# Altium PCB VW.PcbDoc
Units mm, origin at the board's own origin, x right, y up, seen from the top; angles counter-clockwise.
Board outline 83 x 40.5 mm, 2 copper layers (Top Layer, Bottom Layer), stack 0.325 mm thick; 83 components, 67 nets, 368 pads, 30 vias.
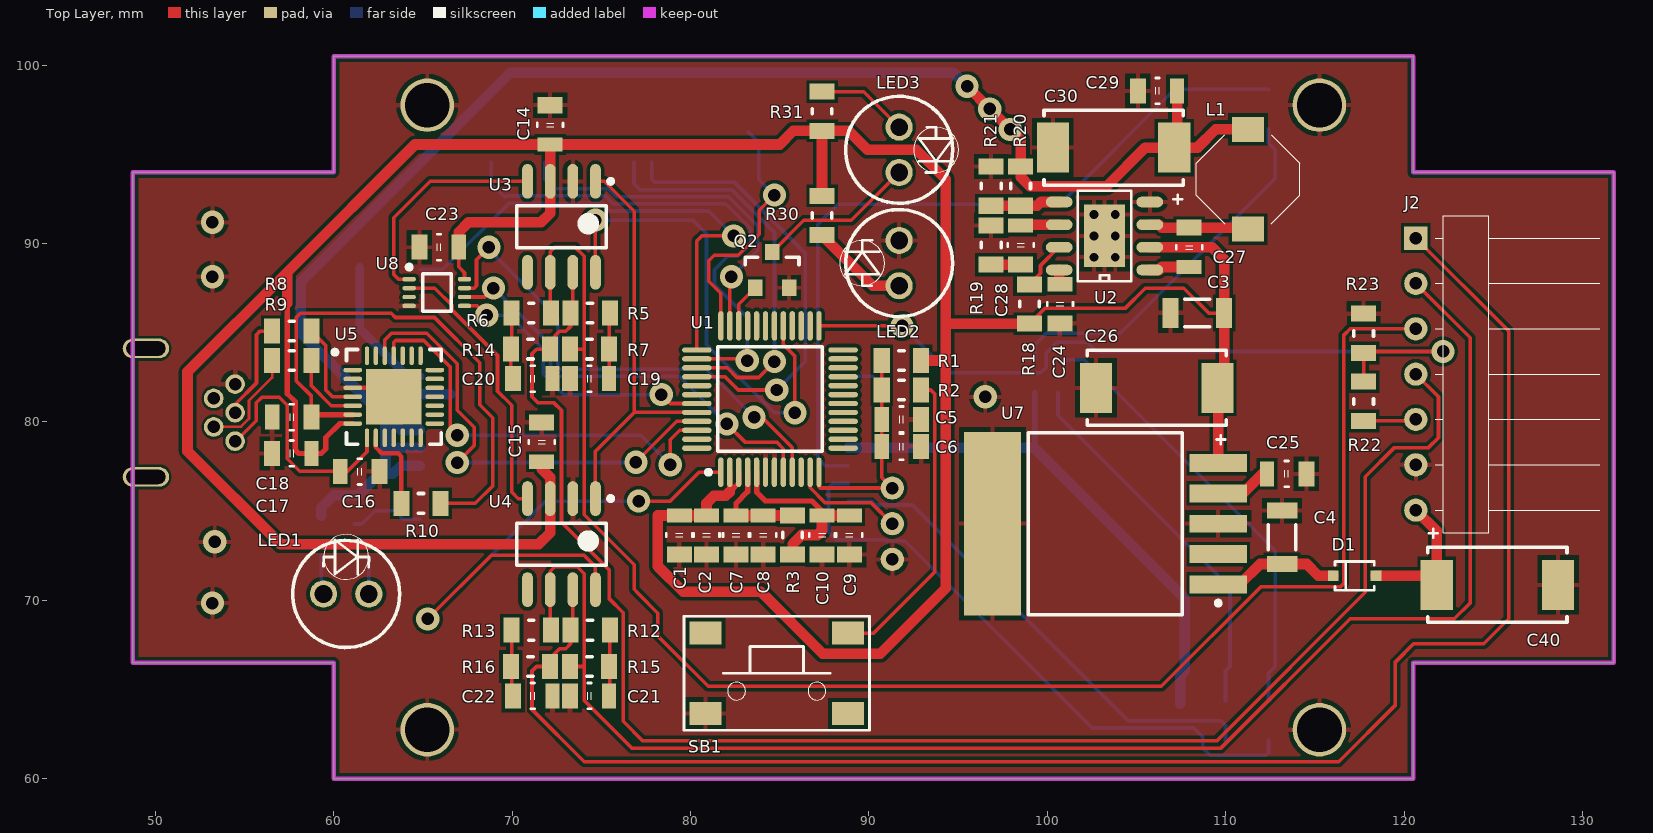
[diagram p0: Top Layer view]
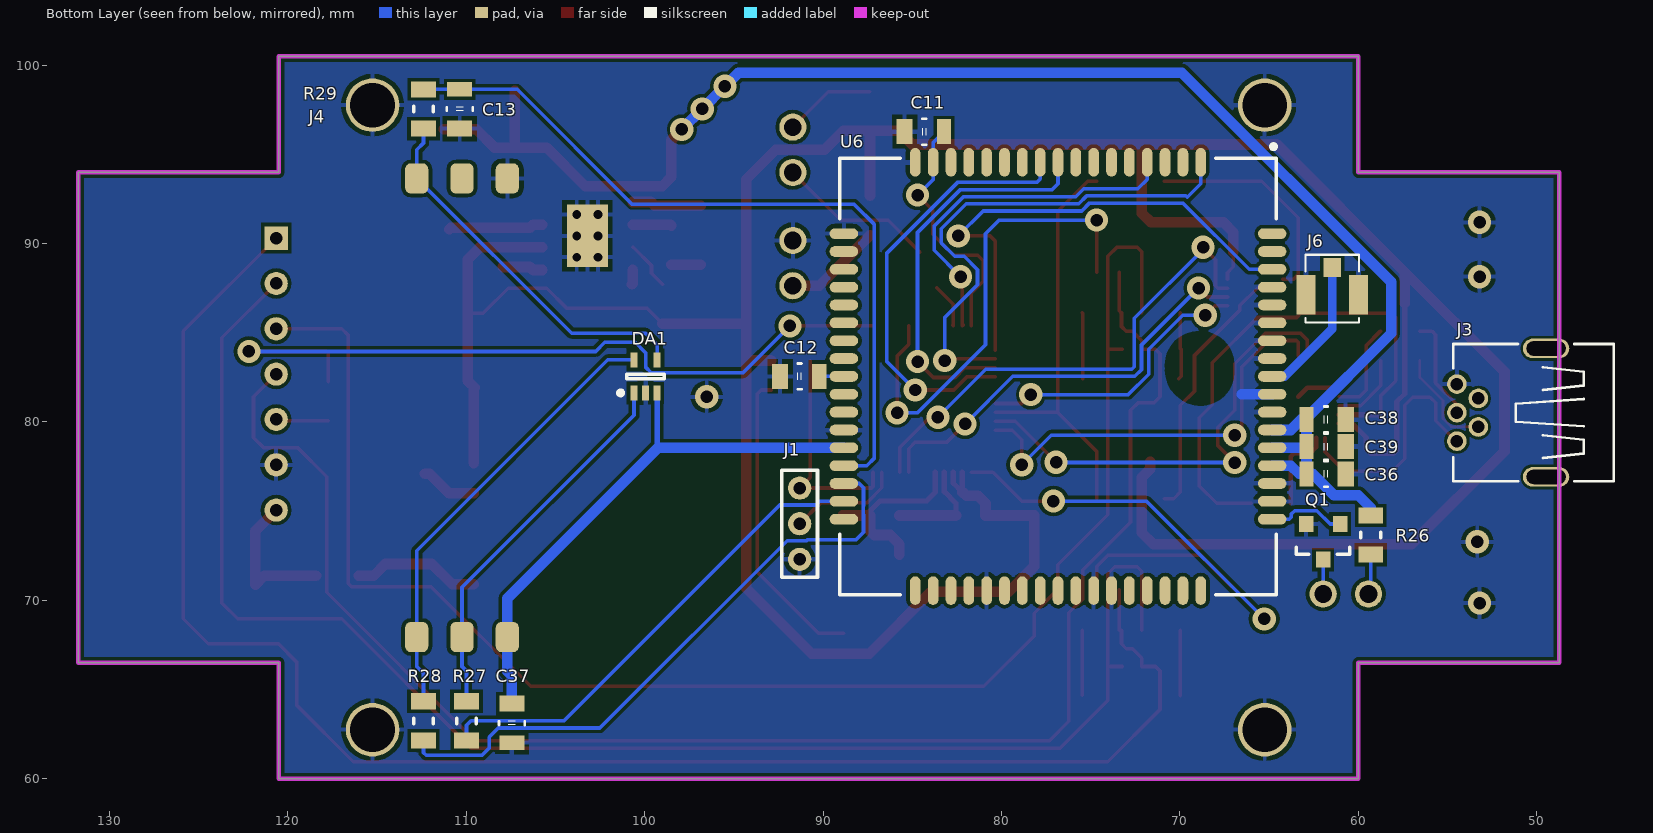
[diagram p1: Bottom Layer view, seen from below]
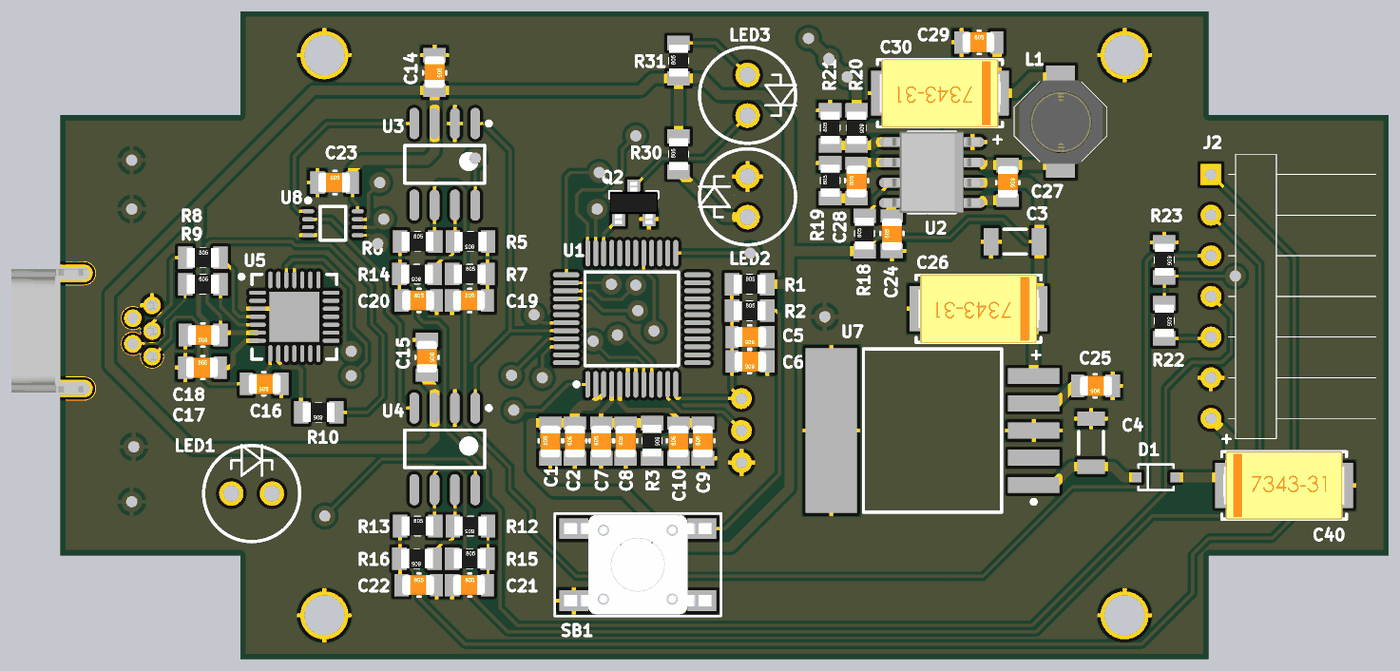
[diagram p2: 3D render of the assembled board from above, using the file's embedded part models]
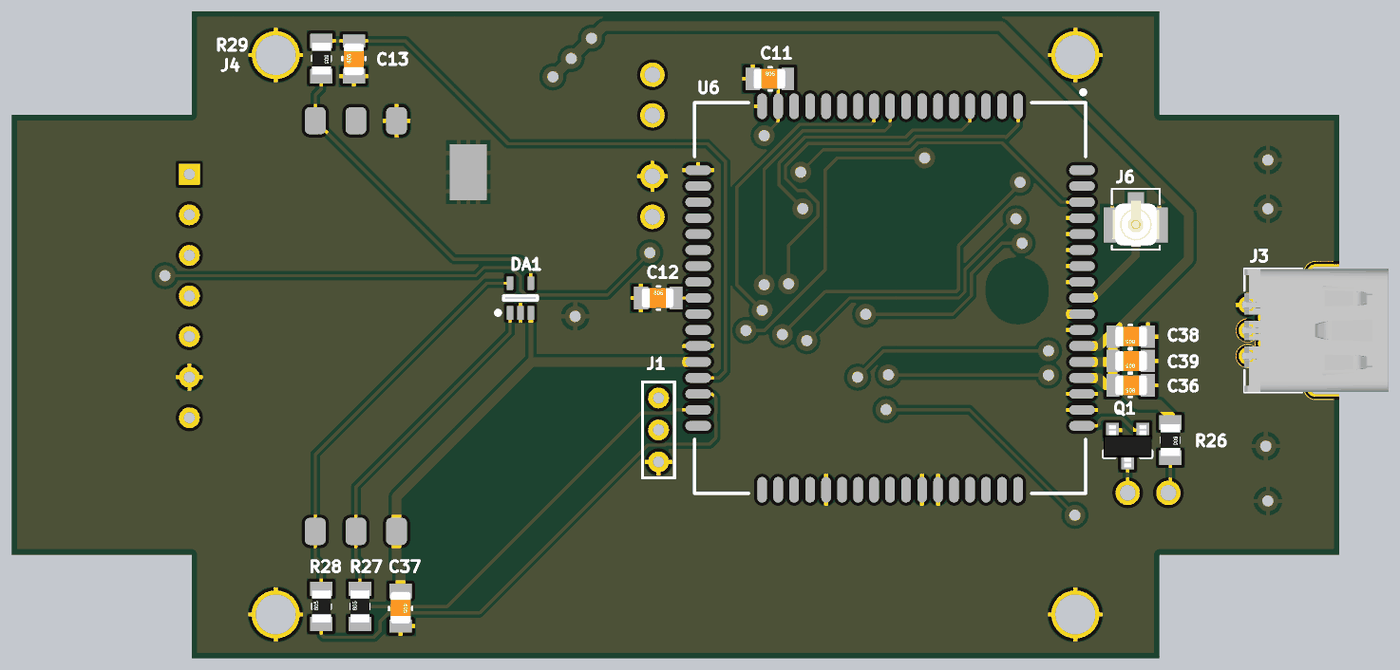
[diagram p3: 3D render of the assembled board from below, using the file's embedded part models]

## Layer stack, top to bottom
Dielectric 2: solder mask 0.0102, Solder Resist, Dk 3.5
Top Layer: signal copper 0.0356
Dielectric 1: core 0.254, FR-4, Dk 4.2
Bottom Layer: signal copper 0.0356
Dielectric 2 (Bottom Solder): solder mask 0.0102, Solder Resist, Dk 3.5

## Board outline
48.75,66.5 48.75,94 60,94 60,100.5 120.5,100.5 120.5,94 131.75,94 131.75,66.5 120.5,66.5 120.5,60 60,60 60,66.5

## Design rules (kind name [scope] priority, off if disabled: settings)
Clearance Clearance_USB [InComponent('J3')] p1: gap=0.15
Clearance [All] p2: gap=0.2
Height [All] p1: minheight=0 maxheight=8 prefheight=2
HoleSize [All] p1: absolutevalues=TRUE maxlimit=4 minlimit=0.5 maxpercent=80.000 minpercent=20.000
HoleToHoleClearance [All] p1: gap=0.2 allowstackedmicrovias=TRUE
MinimumSolderMaskSliver MinimumSolderMaskSliver_USB [InComponent('J3') vs InComponent('J3')] p1: minsoldermaskwidth=0
MinimumSolderMaskSliver [All] p2: minsoldermaskwidth=0.2
PlaneClearance [All] p1: clearance=0.5
PlaneConnect [All] p1: planeconnectstyle=Relief reliefexpansion=0.5 reliefentries=4 reliefconductorwidth=0.25 reliefairgap=0.25
PolygonConnect [All] p1: connectstyle=Relief reliefconductorwidth=0.25 reliefentries=4 polygonreliefangle="90 Angle" airgapwidth=0.25
RoutingCorners [All] p1: cornerstyle=45-Degree minsetback=1 maxsetback=1
RoutingVias [All] p1: holewidth=0.5 width=1 viastyle="Through Hole" minholewidth=0.5 minwidth=1 maxholewidth=1 maxwidth=2
SilkToBoardRegionClearance [NOT(InComponent('J3') OR InComponent('J5'))] p1:
SilkToSilkClearance [All] p1: silktosilkclearance=0.2
SilkToSolderMaskClearance SilkToSolderMaskClearance_RF [IsPad] p1: minsilkscreentomaskgap=0.1 clearancetoexposedcopper=TRUE
SilkToSolderMaskClearance [IsPad] p2: minsilkscreentomaskgap=0.2 clearancetoexposedcopper=TRUE
SolderMaskExpansion [All] p1: expansion=0.2
UnpouredPolygon [All] p1: allowunpoured=FALSE
Width [All] p1: maxlimit=1 minlimit=0.15 preferedwidth=0.2
19 further rules are at their usual default settings.

## Components (designator, comment, footprint, x,y, rotation, side; value= is the part's Value field where it differs from the comment)
C1 "100nF" CAPC0805X11N 79.375,73.66 r90 top
C2 "1uF" CAPC0805X11N 80.899,73.66 r90 top
C3 "10uF" CAPC1206X18N 108.412,86.101 r0 top
C4 "10uF" CAPC1206X18N 113.157,73.533 r270 top
C5 "100nF" CAPC0805X11N 91.821,80.137 r180 top
C6 "1uF" CAPC0805X11N 91.821,78.613 r180 top
C7 "100nF" CAPC0805X11N 82.55,73.66 r90 top
C8 "1uF" CAPC0805X11N 84.074,73.66 r90 top
C9 "100nF" CAPC0805X11N 88.9,73.66 r90 top
C10 "1uF" CAPC0805X11N 87.376,73.66 r90 top
C11 "100nF" CAPC0805X11N 84.328,96.266 r180 bottom
C12 "4.7uF" CAPC0805X11N 91.313,82.55 r180 bottom
C13 "22pF" CAPC0805X11N 110.363,97.536 r90 bottom
C14 "100nF" CAPC0805X11N 72.136,96.647 r270 top
C15 "100nF" CAPC0805X11N 71.662,78.867 r270 top
C16 "1uF" CAPC0805X11N 61.468,77.216 r180 top
C17 "1uF" CAPC0805X11N 57.658,78.232 r0 top
C18 "100nF" CAPC0805X11N 57.658,80.264 r180 top
C19 "47nF" CAPC0805X11N 74.338,82.423 r0 top
C20 "47nF" CAPC0805X11N 71.163,82.423 r0 top
C21 "47nF" CAPC0805X11N 74.338,64.643 r0 top
C22 "47nF" CAPC0805X11N 71.163,64.643 r0 top
C23 "100nF" CAPC0805X11N 65.913,89.789 r0 top
C24 "100nF" CAPC0805X11N 100.711,86.614 r90 top
C25 "100nF" CAPC0805X11N 113.411,77.089 r180 top
C26 "100uF" "CASE (D) TANT" 106.126,81.91 r0 top
C27 "10nF" CAPC0805X11N 107.95,89.784 r270 top
C28 "6.8nF" CAPC0805X11N 98.506,89.911 r90 top
C29 "2.2uF" CAPC0805X11N 106.172,98.552 r0 top
C30 "220uF" "CASE (D) TANT" 103.713,95.372 r0 top
C36 "100nF" CAPC0805X11N 61.811,77.087 r0 bottom
C37 "100nF" CAPC0805X11N 107.442,63.119 r270 bottom
C38 "100nF" CAPC0805X11N 61.811,80.135 r0 bottom
C39 "100nF" CAPC0805X11N 61.811,78.611 r0 bottom
C40 "470uF" "CASE (D) TANT" 125.222,70.866 r180 top
D1 "FM160" SOD323F 117.221,71.374 r90 top
DA1 "SMF05" SOT65P210X110-5N 99.949,82.55 r90 bottom
J1 "DEBUG" PBS2-3 91.313,74.295 r90 bottom
J2 "OBD II" PLS-7R 120.65,86.487 r270 top
J3 "" 54819-0519 54.483,80.518 r270 bottom
J4 "SIM Card" SIM_CARD 112.776,67.945 r90 bottom
J6 "RF CONN" "U. FL connector" 61.468,87.122 r90 bottom
L1 "SPM0518–150M" SPM0518 111.252,93.599 r90 top
LED1 "RED" LED 60.706,70.358 r270 top
LED2 "GREEN" LED 91.694,88.9 r0 top
LED3 "RED" LED 91.694,95.25 r180 top
Q1 "IRLML2402" SOT23 61.976,73.279 r270 bottom
Q2 "IRLML2402" SOT23 84.582,88.519 r90 top
R1 "1K" RESC0805X16N 91.821,83.439 r0 top
R2 "1K" RESC0805X16N 91.821,81.788 r0 top
R3 "2" RESC0805X16N 85.725,73.66 r270 top
R5 "60" RESC0805X16N 74.379,86.106 r180 top
R6 "60" RESC0805X16N 71.077,86.106 r0 top
R7 "60" RESC0805X16N 74.338,84.074 r0 top
R8 "10" RESC0805X16N 57.658,85.09 r0 top
R9 "10" RESC0805X16N 57.658,83.439 r0 top
R10 "4.7K" RESC0805X16N 64.897,75.438 r180 top
R12 "60" RESC0805X16N 74.379,68.326 r180 top
R13 "60" RESC0805X16N 71.077,68.326 r0 top
R14 "60" RESC0805X16N 71.036,84.074 r180 top
R15 "60" RESC0805X16N 74.338,66.294 r0 top
R16 "60" RESC0805X16N 71.036,66.294 r180 top
R18 "100K" RESC0805X16N 99,86.609 r90 top
R19 "6.8K" RESC0805X16N 96.855,89.911 r90 top
R20 "25.5K" RESC0805X16N 98.506,93.213 r270 top
R21 "10K" RESC0805X16N 96.855,93.213 r90 top
R22 "300K" RESC0805X16N 117.729,81.153 r270 top
R23 "100K" RESC0805X16N 117.729,84.963 r270 top
R26 "300" RESC0805X16N 59.309,73.66 r270 bottom
R27 "22" RESC0805X16N 109.982,63.246 r90 bottom
R28 "22" RESC0805X16N 112.395,63.246 r90 bottom
R29 "22" RESC0805X16N 112.395,97.536 r270 bottom
R30 "640" RESC0805X16N 87.376,91.567 r90 top
R31 "640" RESC0805X16N 87.376,97.409 r90 top
SB1 "RESET" SMT_SW6_2MM 84.836,65.913 r0 top
U1 "C8051F580" TSQFP50P900X900X120-48N 84.455,81.28 r90 top
U2 "AP6502" SO-8EP 103.205,90.419 r180 top
U3 "TJA1050T" SOIC127P600X175-8N 72.771,90.932 r270 top
U4 "TJA1050T" SOIC127P600X175-8N 72.771,73.152 r270 top
U5 "CP2101" QFN50P500X500X100_HS-29N 63.373,81.407 r0 top
U6 "SIM900" QFN100P2400X2400X320-68N 76.835,82.55 r270 bottom
U7 "TLE4270" SOT170P1500X440-6N 103.251,74.295 r180 top
U8 "74LVC2G157" TSSOP50P310X90-8N 65.786,87.249 r0 top

## Footprints (in the part's own frame and the unit in brackets; to place one, negate y for a bottom-side part, rotate by r counter-clockwise, add the part's x,y. Pads: shape width x height; smd on the part's side, far side on the other; paste and mask are expansions set on the pad)
54819-0519 [mm]
  round 1.1 hole 0.7: 1(1.6,0) 2(0.8,1.2) 3(0,0) 4(-0.8,1.2) 5(-1.6,0)
  oval 1.1x2.6 hole 0.8 slot 2.2 at 90 deg: 6(-3.6,5) 7(3.6,5)
  silkscreen extent -3.85,-0.2 3.85,8.8, body extent -3.85,-0.2 3.85,8.8, height 3.9
CAPC0805X11N [mm] "Chip Capacitor, 2-Leads, Body 2,0x1,3mm, IPC Medium Density"
  rect 0.9x1.4 smd: 1(-1.1,0)
  rect 0.8x1.4 smd: 2(1.1,0)
  silkscreen extent -0.1,-0.72 0.1,0.72, body extent -1.05,-0.62 0.95,0.62, height 0.78
CAPC1206X18N [mm] "Chip Capacitor, 2-Leads, Body 3,2x1,6mm, IPC Medium Density"
  rect 0.9x1.7 smd: 1(-1.5,0) 2(1.5,0)
  silkscreen extent -0.7,-0.77 0.7,0.77, body extent -1.6,-0.8 1.6,0.8, height 1.75
"CASE (D) TANT" [mm] "Chip Capacitor, 2-Leads, Body 7,3x4,3mm, IPC Medium Density"
  rect 1.8x2.8 smd: 1(-3.4,0) 2(3.4,0)
  silkscreen extent -3.9,-3.15 3.9,2.1, body extent -3.8,-2.15 3.8,2.15, height 3.1
LED [mil]
  round 60 / inner round 70 / far side round 60 hole 39: 1(0,-50) 2(0,50)
  silkscreen extent -131,-50 -32,50
PBS2-3 [mm]
  round 1.3 hole 0.7: 1(-2,0) 2(0,0) 3(2,0)
  silkscreen extent -3,-1 3,1
PLS-7R [mm]
  rect 1.3x1.3 hole 0.7: 1(-3.81,0)
  round 1.3 hole 0.7: 2(-1.27,0) 3(1.27,0) 4(3.81,0) 5(6.35,0) 6(8.89,0) 7(11.43,0)
  silkscreen extent -5.08,1.1 12.7,10.3
QFN50P500X500X100_HS-29N [mm] "QFN, 28-Leads, Body 5,00x5,00mm, Pitch 0,50mm, Thermal Pad 3,13x3,13mm, IPC Medium Density"
  oval 1.05x0.25 smd: 1(-2.3,1.5) 2(-2.3,1) 3(-2.3,0.5) 4(-2.3,0) 5(-2.3,-0.5) 6(-2.3,-1) 7(-2.3,-1.5) 15(2.3,-1.5) 16(2.3,-1) 17(2.3,-0.5) 18(2.3,0) 19(2.3,0.5) 20(2.3,1) 21(2.3,1.5)
  oval 0.25x1.05 smd: 8(-1.5,-2.3) 9(-1,-2.3) 10(-0.5,-2.3) 11(0,-2.3) 12(0.5,-2.3) 13(1,-2.3) 14(1.5,-2.3) 22(1.5,2.3) 23(1,2.3) 24(0.5,2.3) 25(0,2.3) 26(-0.5,2.3) 27(-1,2.3) 28(-1.5,2.3)
  rect 3.13x3.13 smd: EP(0,0)
  silkscreen extent -3.42,-2.65 2.65,2.65, body extent -2.5,-2.5 2.5,2.5, height 1
QFN100P2400X2400X320-68N [mm] "QFN, 68-Leads, Body 24,00x24,00mm, Pitch 1,00mm, IPC Medium Density"
  oval 1.6x0.6 smd: 1(-12,8) 2(-12,7) 3(-12,6) 4(-12,5) 5(-12,4) 6(-12,3) 7(-12,2) 8(-12,1) 9(-12,0) 10(-12,-1) 11(-12,-2) 12(-12,-3) 13(-12,-4) 14(-12,-5) 15(-12,-6) 16(-12,-7) 17(-12,-8) 35(12,-8) 36(12,-7) 37(12,-6) 38(12,-5) 39(12,-4) 40(12,-3) 41(12,-2) 42(12,-1) 43(12,0) 44(12,1) 45(12,2) 46(12,3) 47(12,4) 48(12,5) 49(12,6) 50(12,7) 51(12,8)
  oval 0.6x1.6 smd: 18(-8,-12) 19(-7,-12) 20(-6,-12) 21(-5,-12) 22(-4,-12) 23(-3,-12) 24(-2,-12) 25(-1,-12) 26(0,-12) 27(1,-12) 28(2,-12) 29(3,-12) 30(4,-12) 31(5,-12) 32(6,-12) 33(7,-12) 34(8,-12) 52(8,12) 53(7,12) 54(6,12) 55(5,12) 56(4,12) 57(3,12) 58(2,12) 59(1,12) 60(0,12) 61(-1,12) 62(-2,12) 63(-3,12) 64(-4,12) 65(-5,12) 66(-6,12) 67(-7,12) 68(-8,12)
  Top Layer pour cut-out: -7.3,2.8 -1.7,2.8 -1.7,-2.8 -7.3,-2.8
  Top Layer pour cut-out: -1.651,8.001 -1.564,7.564 -1.316,7.193 -0.945,6.945 -0.508,6.858 -0.508,6.858 -0.071,6.945 0.3,7.193 0.548,7.564 0.635,8.001 0.635,8.001 0.548,8.438 0.3,8.809 -0.071,9.057 -0.508,9.144 -0.508,9.144 -0.945,9.057 -1.316,8.809 -1.564,8.438 -1.651,8.001
  silkscreen extent -13,-12.23 12.23,12.22, body extent -12.07,-12.07 12.07,12.07, height 3.2
RESC0805X16N [mm] "Chip Resistor, 2-Leads, Body 2,0x1,2mm, IPC Medium Density"
  rect 0.9x1.4 smd: 1(-1.1,0) 2(1.1,0)
  silkscreen extent -0.15,-0.55 0.15,0.55, body extent -1,-0.6 1,0.6, height 0.5
SIM_CARD [mm]
  rrect50% 1.7x1.3 smd: C1(0,-5.08) C2(0,-2.54) C3(0,0) C5(25.7,-5.08) C6(25.7,-2.54) C7(25.7,0)
SMT_SW6_2MM [mil]
  rect 71x51 smd: 1(157.48,88.58) 2(-157.48,-88.58) 3(157.48,-88.58) 4(-157.48,88.58)
  silkscreen extent -205,-126 205,126, body extent -181,-122 181,122, height 197
SO-8EP [mm]
  oval 1.5x0.6 smd: 1(-2.54,1.905) 2(-2.54,0.635) 3(-2.54,-0.635) 4(-2.54,-1.905) 5(2.54,-1.905) 6(2.54,-0.635) 7(2.54,0.635) 8(2.54,1.905)
  round 0.9 hole 0.5 mask+0: EP(-0.6,1.19) EP(-0.6,-0.01) EP(-0.6,-1.21) EP(0.6,1.19) EP(0.6,-0.01) EP(0.6,-1.21)
  rect 2.3x3.5 smd mask+0: EP(0,-0.01)
  rect 2.3x3.5 smd far side mask+0: EP(0,-0.01)
  silkscreen extent -1.5,-2.54 1.5,2.54, body extent -3,-2.55 3,2.53, height 1.7
SOD323F [mm]
  rect 0.6x0.6 smd: A(0,-1.2) K(0,1.2)
  silkscreen extent -0.8,-1.1 0.8,1.1
SOIC127P600X175-8N [mm] "SOIC, 8-Leads, Body 4,90x3,90mm, Pitch 1,27mm, IPC Medium Density"
  oval 1.95x0.6 smd: 1(-2.55,1.905) 2(-2.55,0.635) 3(-2.55,-0.635) 4(-2.55,-1.905) 5(2.55,-1.905) 6(2.55,-0.635) 7(2.55,0.635) 8(2.55,1.905)
  silkscreen extent -2.67,-2.5 1.17,2.88, body extent -2,-2.5 2,2.5, height 1.75
SOT23 [mm] "SOT23, 3-Leads, Body 3,0x2,6mm (max), Pitch 0,95mm, IPC Medium Density"
  rect 0.9x0.8 smd: 1(-1,0.95) 2(-1,-0.95) 3(1,0)
  silkscreen extent 0.3,-1.5 0.7,1.5, body extent -1.32,-1.5 1.32,1.5, height 1.08
SOT65P210X110-5N [mm] "SOT23, 5-Leads, Body 2,00x2,10mm, Pitch 0,65mm, IPC Medium Density"
  rect 0.85x0.4 smd: 1(-0.925,0.65) 2(-0.925,0) 3(-0.925,-0.65) 4(0.925,-0.65) 5(0.925,0.65)
  silkscreen extent -1.05,-1.05 0.13,1.53, body extent -0.67,-1.05 0.67,1.05, height 1.1
SOT170P1500X440-6N [mm] "SOT223, 6-Leads, Body 10,00x15,00mm (avg), Pitch 1,70mm, IPC Medium Density"
  rect 3.2x1 smd: 1(-6.325,3.4) 2(-6.325,1.7) 3(-6.325,0) 4(-6.325,-1.7) 5(-6.325,-3.4)
  rect 3.2x10.3 smd: EP(6.325,0)
  silkscreen extent -6.45,-5.1 4.32,5.1, body extent -4.72,-5.1 4.73,5.1, height 4.4
SPM0518 [mm]
  rect 1.4x1.8 smd: 1(-2.8,0) 2(2.8,0)
  silkscreen extent -2.5,-2.9 2.5,2.9, body extent -2.63,-2.62 2.57,2.58, height 2.8
TSQFP50P900X900X120-48N [mm] "TSQFP, 48-Leads, Body 7,00x7,00mm, Pitch 0,50mm, IPC Medium Density"
  oval 1.65x0.3 smd: 1(-4.1,2.75) 2(-4.1,2.25) 3(-4.1,1.75) 4(-4.1,1.25) 5(-4.1,0.75) 6(-4.1,0.25) 7(-4.1,-0.25) 8(-4.1,-0.75) 9(-4.1,-1.25) 10(-4.1,-1.75) 11(-4.1,-2.25) 12(-4.1,-2.75) 25(4.1,-2.75) 26(4.1,-2.25) 27(4.1,-1.75) 28(4.1,-1.25) 29(4.1,-0.75) 30(4.1,-0.25) 31(4.1,0.25) 32(4.1,0.75) 33(4.1,1.25) 34(4.1,1.75) 35(4.1,2.25) 36(4.1,2.75)
  oval 0.3x1.65 smd: 13(-2.75,-4.1) 14(-2.25,-4.1) 15(-1.75,-4.1) 16(-1.25,-4.1) 17(-0.75,-4.1) 18(-0.25,-4.1) 19(0.25,-4.1) 20(0.75,-4.1) 21(1.25,-4.1) 22(1.75,-4.1) 23(2.25,-4.1) 24(2.75,-4.1) 37(2.75,4.1) 38(2.25,4.1) 39(1.75,4.1) 40(1.25,4.1) 41(0.75,4.1) 42(0.25,4.1) 43(-0.25,4.1) 44(-0.75,4.1) 45(-1.25,4.1) 46(-1.75,4.1) 47(-2.25,4.1) 48(-2.75,4.1)
  silkscreen extent -4.22,-2.92 2.92,3.57, body extent -3.5,-3.5 3.5,3.5, height 1.2
TSSOP50P310X90-8N [mm] "TSSOP, 8-Leads, Body 2,00x2,30mm, Pitch 0,50mm, IPC Medium Density"
  oval 0.75x0.25 smd: 1(-1.55,0.75) 2(-1.55,0.25) 3(-1.55,-0.25) 4(-1.55,-0.75) 5(1.55,-0.75) 6(1.55,-0.25) 7(1.55,0.25) 8(1.55,0.75)
  silkscreen extent -1.67,-1.05 0.8,1.55, body extent -1.2,-1.05 1.2,1.05, height 0.9
"U. FL connector" [mm]
  rect 1.05x1 smd mask+0.05: 1(1.525,0)
  rect 2.2x1.05 smd mask+0.05: 2(0,-1.475) 3(0,1.475)
  Top Layer pour cut-out: 1,0.9 1,-0.9 -1.1,-0.9 -1.1,0.9
  silkscreen extent -1.55,-1.5 2.25,1.5, body extent -1.37,-1.45 1.53,1.45, height 1.25

## Part data
C1 C2 C5 C6 C7 C8 C9 C10 C11 C12 C13 C14 C15 C16 C17 C18 C19 C20 C21 C22 C23 C25 C36 C37 C38 C39: library part Capacitor
C3 C4: library part Capacitor, "SMD 1206"
C24 C27 C28 C29: library part Capacitor, "SMD 0603"
C26 C30: library part "Capacitor (elec)", "Tantalum D Type capacitor"
C40: library part "Capacitor (elec)", "D-8, h-11.5"
D1: library part "DIODE SCHOTTKY"
J1: library part XS-3
J2: library part XP-7
J3: library part miniUSB
J4: library part SIM_CARD
J6: library part XP-3
L1: library part INDUCTOR, "Inductor"
LED1 LED2 LED3: library part LED
Q1 Q2: library part MOSFET-N, "N-Channel MOSFET"
R1 R2 R3 R5 R6 R7 R8 R9 R10 R12 R13 R14 R15 R16 R22 R23 R26 R27 R28 R29 R30 R31: library part Res
R18 R19 R20 R21: library part Res, "SMD 0603"
SB1: library part Button
U2: "DC/DC Converter"

## Free pads (board coordinates)
  round 3 hole 2.5: 0(65.25,62.75) 0(65.25,97.75) 0(115.25,62.75) 0(115.25,97.75)

## Via types
v1: diameter 1.3, hole 0.7, Top Layer to Bottom Layer, tented both sides, 30 vias

## Nets (pads, with @x,y where several pads share a name; then routed paths per layer and width w, separated by ;. In a path a pad name is that pad's centre, name@x,y a point inside that pad or via, vN(x,y) a via of type N, cw(c..) or ccw(c..) an arc to the next point about the centre after c; other vN are vias at no path point)
+3.3V: C29.2 C30.2 C36.2 C38.2 C39.2 L1.2 R20.1 R26.1 U6.55 U6.56 U6.57 | length 93.5
  Top Layer w0.6: v1(95.504,98.806) v1(96.774,97.536) v1(97.917,96.393) 98.506,95.804 R20.1 98.506,93.721 99.014,93.213 103.332,93.213 105.491,95.372 C30.2 ; C29.2 107.272,95.531 C30.2 ; L1.2@111.252,96.394 109.434,96.394 108.412,95.372 C30.2
  Bottom Layer w0.6: R26.1 59.309,75.184 60.012,75.887 61.368,75.887 62.568,77.087 C36.2 ; U6.55 63.784,77.548 63.323,77.087 C36.2 ; U6.56@64.835,78.548 62.974,78.548 C39.2 ; U6.57@64.835,79.548 63.784,79.548 63.197,80.135 C38.2 ; v1(97.917,96.393) v1(96.774,97.536) v1(95.504,98.806) 94.742,99.568 69.896,99.568 58.166,87.838 58.166,84.963 62.911,80.218 C38.2 ; C36.2 C39.2 ; C39.2 C38.2
+5V: C1.2 C2.2 C3.2 C14.2 C15.2 C17.2 C23.2 C26.2 R1.2 R18.1 R30.2 R31.1 U1.2 U1.3 U2.2 U3.3 U4.3 U5.7 U7.5 U8.8 | length 198.1
  Top Layer w0.2: C23.2@67.013,89.535 67.013,88.689 67.336,88.366 U8.8 ; R18.1 99.851,86.36 104.353,86.36 105.491,87.498 107.65,87.498 109.047,86.101 C3.2
  Top Layer w0.3: 57.404,86.657 57.404,81.579 57.854,81.129 57.854,78.417 58.039,78.232 C17.2 59.309,78.232 59.563,78.486 59.563,79.121 60.349,79.907 U5.7 ; U1.2 82.205,76.066 82.705,76.566 U1.3
  Top Layer w0.6: 57.404,86.657 57.404,88.392 ; C23.2@67.013,89.535 67.013,90.635 67.564,91.186 71.628,91.186 72.136,91.694 U3.3 C14.2 ; C15.2 71.662,77.361 72.136,76.887 U4.3 72.136,73.787 71.501,73.152 57.023,73.152 51.816,78.359 51.816,82.804 57.404,88.392 ; 82.205,76.066 82.185,76.066 81.974,75.855 81.316,75.855 80.899,75.438 C2.2 C1.2 78.175,74.76 78.175,71.903 79.593,70.485 83.947,70.485 87.417,67.015 90.637,67.015 94.302,70.68 94.302,83.439 ; R30.2 R31.1@87.376,96.223 ; R1.2 94.302,83.439 ; R18.1 94.302,85.509 ; U2.2 109.225,89.784 109.912,89.097 C3.2 109.912,82.296 C26.2 109.576,81.86 U7.5 ; 57.404,88.392 64.559,95.547 C14.2 ; C14.2 85.006,95.547 85.768,96.309 R31.1 88.857,96.309 89.916,95.25 92.651,95.25 94.302,93.599 94.302,85.509 ; 94.302,83.439 94.302,85.509
+12V: C4.2 D1.K U7.1 | length 7.2
  Top Layer w0.6: U7.1 110.79,70.895 111.928,72.033 C4.2 114.53,72.033 115.189,71.374 D1.K
GND_POWER: C1.1 C2.1 C3.1 C4.1 C5.1 C6.1 C7.1 C8.1 C9.1 C10.1 C11.1 C12.1 C13.1 C14.1 C15.1 C16.1 C17.1 C18.2 C19.1 C20.2 C21.1 C22.2 C23.1 C24.1 C25.1 C26.1 C29.1 C30.1 C36.1 C37.2 C38.1 C39.1 C40.1 DA1.2 J1.1 J2.6 J3.5 J4.C5 J6.2 J6.3 LED2.2 pad.0 Q1.2 Q2.2 R19.2 R21.2 R23.1 SB1.2 U1.6 U1.7 U2.4 U2.EP U3.2 U4.2 U5.3 U5.EP U6.17 U6.18 U6.29 U6.39 U6.45 U6.46 U6.53 U6.54 U6.58 U6.59 U6.61 U6.62 U6.63 U6.64 U6.65 U7.3 U7.EP U8.4 | length 4.2
  Top Layer w0.25: U5.3 62.873,81.907 U5.EP
  Bottom Layer w0.6: U6.59 66.532,81.55
  other v1: 53.213,69.85 53.34,73.279 96.52,81.407 53.213,88.138 53.213,91.186
NetC5_2: C5.2 C6.2 J1.3 R1.1 R2.1 U1.12 | length 12.3
  Top Layer w0.2: U1.12 87.205,76.371 87.281,76.295 J1.3 90.721,76.887 C6.2 C5.2 R2.1 R1.1
NetC11_2: C11.2 U1.36 U6.16 | length 14.1
  Top Layer w0.2: U1.36 81.705,87.205 81.026,87.884 81.026,89.027 81.341,89.342 82.685,89.342 83.857,90.514 83.857,91.858 v1(84.709,92.71)
  Bottom Layer w0.2: C11.2 83.835,95.659 U6.16 83.835,93.584 v1(84.709,92.71)
NetC12_2: C12.2 U6.26 | length 1.4
  Bottom Layer w0.2: U6.26 C12.2
NetC13_2: C13.2 R29.1 U6.31 | length 43.4
  Bottom Layer w0.2: U6.31 87.55,77.55 87.122,77.978 87.122,91.059 88.265,92.202 100.711,92.202 107.145,98.636 R29.1
NetC16_2: C16.2 J3.1 U5.8 | length 13.7
  Top Layer w0.2: J3.1 54.521,78.918 55.668,80.065 55.668,81.068 55.991,81.391 56.955,81.391 57.404,80.942 57.404,77.935 58.107,77.232 60.352,77.232 C16.2 60.754,77.216 61.873,78.335 U5.8
NetC18_1: C18.1 R10.1 U5.6 | length 30.4
  Top Layer w0.2: C18.1 58.758,81.45 57.912,82.296 57.912,85.852 58.15,86.09 63.23,86.09 63.468,85.852 65.659,85.852 68.199,83.312 68.199,80.955 68.914,80.24 68.914,76.407 67.945,75.438 R10.1
  Top Layer w0.3: C18.1@58.631,80.391 C18.1@58.631,80.407 ; C18.1 58.901,80.407 U5.6
NetC19_2: C19.2 R5.1 R7.2 | length 3.7
  Top Layer w0.2: C19.2 R7.2 75.438,86.065 R5.1
NetC20_1: C20.1 R6.1 R14.2 | length 3.8
  Top Layer w0.2: R6.1 69.977,84.115 R14.2 69.936,82.55 C20.1
NetC21_2: C21.2 R12.1 R15.2 | length 3.6
  Top Layer w0.2: C21.2@75.479,64.684 R12.1
NetC22_1: C22.1 R13.1 R16.2 | length 3.7
  Top Layer w0.2: C22.1@69.977,64.643 R13.1
NetC24_2: C24.2 U2.8 | length 0.8
  Top Layer w0.6: U2.8 100.665,87.76 C24.2
NetC25_2: C25.2 U7.4 | length 3.2
  Top Layer w0.6: U7.4 110.963,75.995 112.057,77.089 C25.2
NetC27_1: C27.1 L1.1 U2.3 | length 5.3
  Top Layer w0.6: U2.3 106.253,91.054 106.423,90.884 110.862,90.884 L1.1@110.952,90.794
NetC27_2: C27.2 U2.1 | length 2.3
  Top Layer w0.6: U2.1 106.253,88.514 106.423,88.684 C27.2
NetC28_1: C28.1 R19.1 | length 1.7
  Top Layer w0.6: R19.1 C28.1
NetC28_2: C28.2 U2.6 | length 2.2
  Top Layer w0.6: C28.2 98.549,91.054 U2.6
NetC37_1: C37.1 DA1.3 J4.C1 U6.30 | length 31.4
  Bottom Layer w0.3: 99.25,78.55 99.299,78.599 DA1.3
  Bottom Layer w0.6: U6.30 99.25,78.55 107.696,70.104 J4.C1 107.696,66.04 107.442,65.786 C37.1
NetC40_2: C40.2 D1.A J2.7 | length 8.3
  Top Layer w0.6: D1.A 121.314,71.374 C40.2 121.822,73.885 J2.7
NetDA1_1: DA1.1 J4.C2 R27.2 | length 21.4
  Bottom Layer w0.2: DA1.1 100.599,80.376 110.236,70.739 J4.C2 110.236,66.294 109.982,66.04 R27.2
NetDA1_4: DA1.4 J4.C7 R29.2 | length 21.1
  Bottom Layer w0.2: DA1.4 99.299,84.313 99.949,84.963 104.094,84.963 J4.C7 112.776,95.25 112.395,95.631 R29.2
NetDA1_5: DA1.5 J4.C3 R28.2 | length 25.4
  Bottom Layer w0.2: DA1.5 102.072,83.475 112.776,72.771 J4.C3 112.776,66.294 112.395,65.913 R28.2 R28.2@112.522,64.473
NetJ1_2: J1.2 U1.11 | length 6.3
  Top Layer w0.2: U1.11 86.705,76.305 87.55,75.46 90.148,75.46 J1.2
NetJ2_1: J2.1 R12.2 R16.1 U4.7 | length 92.4
  Top Layer w0.2: R12.2 73.279,67.564 73.009,67.294 72.664,67.294 72.136,66.766 R16.1 71.374,66.294 71.12,66.04 71.12,63.881 74.051,60.95 116.322,60.95 119.507,64.135 119.507,66.548 120.523,67.564 124.46,67.564 125.857,68.961 125.857,85.09 J2.1 ; R12.2@73.406,68.326 U4.7
NetJ2_2: J2.2 R13.2 R15.1 U4.6 | length 86.7
  Top Layer w0.2: R13.2@72.136,68.326 U4.6 72.136,71.628 72.39,71.882 73.65,71.882 74.041,71.491 74.041,66.294 ; R15.1 74.041,66.294 ; J2.2 123.698,84.709 123.698,69.85 122.809,68.961 116.967,68.961 109.728,61.722 76.708,61.722 74.041,64.389 74.041,66.294
NetJ2_3: J2.3 R6.2 R7.1 U3.6 | length 89.6
  Top Layer w0.2: R6.2 72.136,86.147 U3.6 72.136,89.535 72.39,89.789 73.533,89.789 74.041,89.281 74.041,84.074 ; R7.1 74.041,84.074 ; J2.3 116.967,85.217 116.621,84.871 116.621,70.95 116.445,70.774 111.979,70.774 106.391,65.186 80.991,65.186 78.174,68.003 78.174,69.284 77.089,70.369 76.841,70.617 76.841,72.003 74.041,74.803 74.041,84.074
NetJ2_4: J2.4 R5.2 R14.1 U3.7 | length 90.5
  Top Layer w0.2: U3.7 73.406,86.233 R5.2 73.279,85.344 73.009,85.074 72.664,85.074 72.136,84.546 R14.1 71.374,84.074 71.12,83.82 71.12,81.407 71.465,81.062 72.354,81.062 72.771,80.645 72.771,74.381 75.438,71.714 75.438,70.104 76.229,69.313 76.229,63.217 77.324,62.122 109.493,62.122 117.821,70.45 117.821,76.927 119.455,78.561 121.36,78.561 121.92,79.121 121.92,81.407 J2.4
NetJ2_5: J2.5 R22.2 | length 3
  Top Layer w0.2: R22.2 120.566,80.053 J2.5
NetJ3_2: J3.2 R9.1 | length 6
  Top Layer w0.15: J3.2 53.3,79.735 54.807,79.735 55.258,80.186 55.258,81.188 56.558,82.488 R9.1
NetJ3_3: J3.3 R8.1 | length 5.8
  Top Layer w0.2: J3.3 54.483,80.987 55.681,82.185 55.681,84.891 55.88,85.09 R8.1
NetJ6_1: J6.1 U6.60 | length 7.9
  Bottom Layer w0.5: J6.1 61.468,85.217 64.135,82.55 U6.60
NetLED1_1: LED1.1 R26.2 | length 2.3
  Bottom Layer w0.2: R26.2 59.309,70.485 LED1.1
NetLED1_2: LED1.2 Q1.3 | length 2.1
  Bottom Layer w0.2: Q1.3 LED1.2 LED1.2@62.103,70.485
NetLED2_1: LED2.1 R30.1 | length 5.5
  Top Layer w0.6: R30.1 90.213,87.63 LED2.1
NetLED3_1: LED3.1 R31.2 | length 5.1
  Top Layer w0.2: R31.2 89.705,98.509 LED3.1
NetLED3_2: LED3.2 Q2.3 | length 9
  Top Layer w0.2: Q2.3 86.357,91.294 89.008,91.294 LED3.2
NetQ1_1: Q1.1 U6.52 | length 4.3
  Bottom Layer w0.2: Q1.1@61.153,74.279 61.579,74.279 62.329,75.029 63.577,75.029 63.753,74.853 63.753,74.677 63.88,74.55 U6.52
NetQ2_1: Q2.1 U1.34 | length 2.6
  Top Layer w0.2: U1.34@82.743,85.418 U1.34 82.705,86.592 Q2.1
NetR2_2: R2.2 SB1.1 | length 17.1
  Top Layer w0.2: SB1.1 90.261,68.163 93.702,71.604 93.702,81.558 93.472,81.788 R2.2
NetR8_2: R8.2 U5.4 | length 5.3
  Top Layer w0.2: R8.2 59.563,84.285 59.563,81.788 59.944,81.407 U5.4
NetR9_2: R9.2 U5.5 | length 4.2
  Top Layer w0.2: R9.2 58.758,82.027 59.878,80.907 U5.5
NetR10_2: R10.2 U5.9 | length 4.8
  Top Layer w0.25: U5.9 62.373,78.571 62.703,78.241 63.618,78.241 63.797,78.062 R10.2
NetR18_2: R18.2 U2.7 | length 2.8
  Top Layer w0.2: R18.2 99.615,88.324 99.615,88.763 100.636,89.784 U2.7
NetR20_2: R20.2 R21.1 U2.5 | length 3.9
  Top Layer w0.6: R21.1 R20.2 99.438,92.113 99.649,92.324 U2.5
NetR22_1: R22.1 R23.2 U1.25 | length 43.5
  Top Layer w0.2: U1.25 v1(91.857,85.38) ; R22.1 R23.2 117.813,83.947 v1(122.174,83.947)
  Bottom Layer w0.2: v1(91.857,85.38) 94.487,82.75 99.623,82.75 99.949,83.076 99.949,83.874 100.53,84.455 102.235,84.455 102.743,83.947 v1(122.174,83.947)
NetR27_1: R27.1 U6.33 | length 27.2
  Bottom Layer w0.2: U6.33 90.185,75.55 90.39,75.345 92.422,75.345 104.521,63.246 109.728,63.246 109.982,62.992 R27.1
NetR28_1: R28.1 U6.32 | length 34.6
  Bottom Layer w0.2: U6.32 87.98,76.55 87.735,76.305 87.735,75.301 87.757,75.279 87.757,74.821 87.735,74.799 87.735,73.809 88.138,73.406 90.858,73.406 90.919,73.345 92.009,73.345 102.508,62.846 108.204,62.846 108.712,62.338 108.712,61.722 109.115,61.319 112.246,61.319 112.395,61.468 R28.1
NetU1_1: U1.1 U4.8 | length 32.2
  Top Layer w0.2: v1(65.278,68.961) 68.834,72.517 74.041,72.517 74.676,71.882 U4.8 ; v1(77.089,75.565) 78.867,75.565 80.482,77.18 U1.1
  Bottom Layer w0.2: v1(65.278,68.961) 71.882,75.565 v1(77.089,75.565)
NetU1_8: U1.8 U8.6 | length 23.9
  Top Layer w0.2: U8.6 68.457,86.999 v1(68.961,87.503) ; v1(82.042,79.883) 83.054,78.871 84.832,78.871 85.205,78.498 U1.8
  Bottom Layer w0.2: v1(68.961,87.503) 72.155,84.309 72.155,82.931 72.536,82.55 79.375,82.55 v1(82.042,79.883)
NetU1_9: U1.9 U8.7 | length 28.2
  Top Layer w0.2: U8.7 67.88,87.499 68.011,87.63 68.011,89.093 v1(68.707,89.789) ; v1@83.566,80.587 v1(83.566,80.264) 84.005,80.264 85.705,78.564 U1.9
  Bottom Layer w0.2: v1(68.707,89.789) 68.707,89.657 72.555,85.809 72.555,83.097 72.702,82.95 80.88,82.95 v1(83.566,80.264)
NetU1_29: U1.29 U3.8 | length 27.4
  Top Layer w0.2: U3.8 v1(74.676,91.313) ; U1.29 85.205,84.34 85.852,83.693 v1(85.852,80.518)
  Bottom Layer w0.2: v1(74.676,91.313) 80.137,91.313 80.899,90.551 80.899,84.328 84.709,80.518 v1(85.852,80.518)
NetU1_35: U1.35 U6.4 | length 20.3
  Top Layer w0.2: U1.35@82.155,85.43 U1.35 82.205,88.047 v1(82.296,88.138)
  Bottom Layer w0.2: U6.4 71.835,93.588 72.36,93.063 75.401,93.063 75.843,92.621 82.135,92.621 83.773,90.983 83.773,89.615 v1(82.296,88.138)
NetU1_37: U1.37 U6.66 | length 28.2
  Top Layer w0.2: U1.37 80.355,90.134 80.645,90.424 v1(82.423,90.424)
  Bottom Layer w0.2: U6.66 66.124,88.55 69.837,92.263 75.07,92.263 75.512,91.821 81.026,91.821 v1(82.423,90.424)
NetU1_38: U1.38 U6.1 | length 29
  Top Layer w0.2: U1.38 83.094,83.53 v1(83.185,83.439)
  Bottom Layer w0.2: U6.1 68.835,93.344 69.594,92.585 69.672,92.663 75.235,92.663 75.677,92.221 81.97,92.221 83.373,90.818 83.373,90.03 82.624,89.281 82.095,89.281 81.346,88.532 81.346,87.691 83.185,85.852 v1(83.185,83.439)
NetU1_39: U1.39 U6.9 | length 22.4
  Top Layer w0.2: U1.39 82.07,83.03 82.611,82.489 83.82,82.489 v1(84.709,83.378)
  Bottom Layer w0.2: U6.9 76.835,93.345 77.159,93.021 82.301,93.021 84.709,90.613 v1(84.709,83.378)
NetU1_40: U1.40 U6.10 | length 24.4
  Top Layer w0.2: U1.40 81.935,82.53 82.677,81.788 v1(84.836,81.788)
  Bottom Layer w0.2: U6.10 77.835,93.615 78.029,93.421 82.467,93.421 86.421,89.467 86.421,83.373 v1(84.836,81.788)
NetU1_43: U1.43 U8.5 | length 16.5
  Top Layer w0.2: U8.5 68.06,86.499 v1@68.43,86.13 ; v1@68.326,86.026 v1@68.43,86.13 ; v1(68.58,85.979) v1@68.43,86.13 ; v1@68.58,86.28 v1@68.43,86.13 ; v1(78.359,81.534) 78.863,81.03 U1.43
  Bottom Layer w0.2: v1(68.58,85.979) 69.85,85.979 71.755,84.074 71.755,82.677 72.898,81.534 v1(78.359,81.534)
NetU1_44: U1.44 U3.1 U4.1 | length 23.4
  Top Layer w0.2: U4.1 74.676,78.359 76.847,80.53 ; U3.1 75.174,93.482 76.847,91.809 76.847,80.53 ; U1.44 76.847,80.53
NetU1_45: U1.45 U5.26 | length 26.5
  Top Layer w0.2: U5.26 62.873,84.59 63.246,84.963 65.22,84.963 66.929,83.254 66.929,80.645 67.879,79.695 67.879,78.674 v1(66.929,77.724) ; v1(76.943,77.743) 79.23,80.03 U1.45
  Bottom Layer w0.2: v1(66.929,77.724) 76.924,77.724 v1(76.943,77.743)
NetU1_46: U1.46 U5.25 | length 24.3
  Top Layer w0.2: U5.25 63.373,84.455 63.481,84.563 65.055,84.563 66.529,83.089 66.529,79.648 v1(66.929,79.248) ; v1(78.867,77.597) 78.867,78.994 79.403,79.53 U1.46
  Bottom Layer w0.2: v1(66.929,79.248) 77.216,79.248 v1(78.867,77.597)
NetU3_4: U3.4 U8.1 | length 12.5
  Top Layer w0.2: U8.1 63.639,87.999 63.373,88.265 63.373,91.44 65.415,93.482 U3.4
NetU4_4: U4.4 U8.2 | length 15.7
  Top Layer w0.2: U8.2 65.663,87.499 66.661,86.501 66.661,86.247 69.186,83.722 69.186,81.726 69.977,80.935 69.977,76.073 70.348,75.702 U4.4
VDD: C7.2 C8.2 R3.1 U1.4 | length 5.9
  Top Layer w0.3: C7.2 82.55,75.438 83.205,76.093 U1.4
  Top Layer w0.6: C7.2 C8.2 R3.1
VDDA: C9.2 C10.2 R3.2 U1.5 | length 10.4
  Top Layer w0.3: U1.5 83.705,76.061 84.201,75.565 86.809,75.565 87.364,75.01 87.376,75.01 C10.2
  Top Layer w0.6: R3.2 85.725,73.152 86.233,73.66 87.122,73.66 87.376,73.914 C10.2 C9.2
pads on no net: J3.4 J3.6 J3.7 J4.C6 SB1.3 SB1.4 U1.10 U1.13 U1.14 U1.15 U1.16 U1.17 U1.18 U1.19 U1.20 U1.21 U1.22 U1.23 U1.24 U1.26 U1.27 U1.28 U1.30 U1.31 U1.32 U1.33 U1.41 U1.42 U1.47 U1.48 U3.5 U4.5 U5.1 U5.2 U5.10 U5.11 U5.12 U5.13 U5.14 U5.15 U5.16 U5.17 U5.18 U5.19 U5.20 U5.21 U5.22 U5.23 U5.24 U5.27 U5.28 U6.2 U6.3 U6.5 U6.6 U6.7 U6.8 U6.11 U6.12 U6.13 U6.14 U6.15 U6.19 U6.20 U6.21 U6.22 U6.23 U6.24 U6.25 U6.27 U6.28 U6.34 U6.35 U6.36 U6.37 U6.38 U6.40 U6.41 U6.42 U6.43 U6.44 U6.47 U6.48 U6.49 U6.50 U6.51 U6.67 U6.68 U7.2 U8.3

## Polygon pours and split planes (outlines as drawn)
GND_POWER on Bottom Layer "Top Layer-GND_POWER" (solid, remove dead copper, pour order 7): 48.75,94 60,94 60,100.5 120.5,100.5 120.5,94 131.75,94 131.699,93.949 131.699,66.5 120.5,66.5 120.5,60 60,60 60,66.5 48.75,66.5
GND_POWER on Top Layer "Top Layer-No Net" (solid, remove dead copper, pour order 8): 48.75,94 60,94 60,100.5 120.5,100.5 120.5,94 131.75,94 131.699,93.949 131.699,66.5 120.5,66.5 120.5,60 60,60 60,66.5 48.75,66.5

## Keep-outs
Keep-Out Layer:
  the board outline again, w0.254

## Other copper
Bottom Layer:
  pour cut-out: 80.264,90.297 73.406,90.297 73.406,83.693 80.293,83.693 80.293,90.326
  pour cut-out: 68.834,80.899 ccw(c68.834,82.931) 70.866,82.931 70.866,83.185 ccw(c68.961,83.185) 68.961,85.09 68.834,85.09 ccw(c68.834,83.185) 66.929,83.185 66.929,82.804 ccw(c68.834,82.804)

## Silkscreen, mask and mechanical layers (free items; w line width, h text height)
Top Overlay 1:
  circle w0.2: c91.694,88.9 r3
  circle w0.2: c91.694,95.25 r3
  circle w0.2: c60.706,70.358 r3